# Altium PCB POWER-BOARD.PcbDoc
Units mil, origin at the board's own origin, x right, y up, seen from the top; angles counter-clockwise.
Board outline 475.03 x 1333.03 mil, 2 copper layers (Top Layer, Bottom Layer); 14 components, 9 nets, 52 pads, 14 vias.
Unrouted connection lines stored in the file: 1.
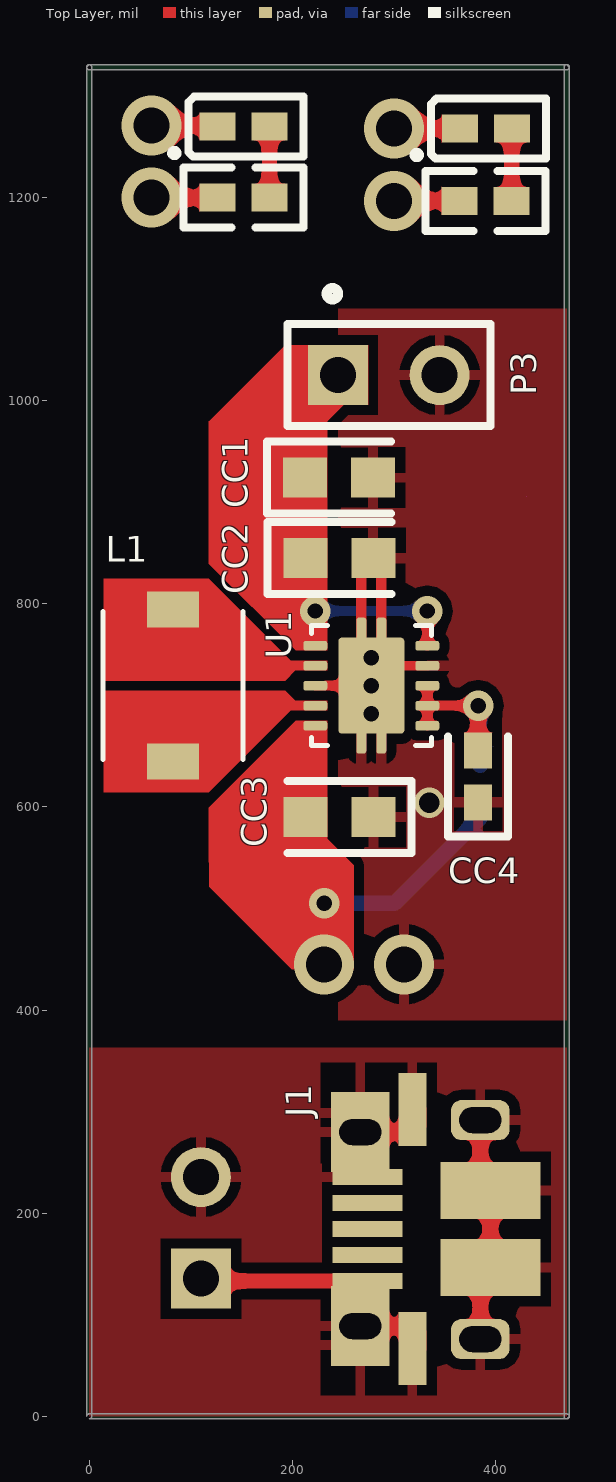
[diagram p0: Top Layer view]
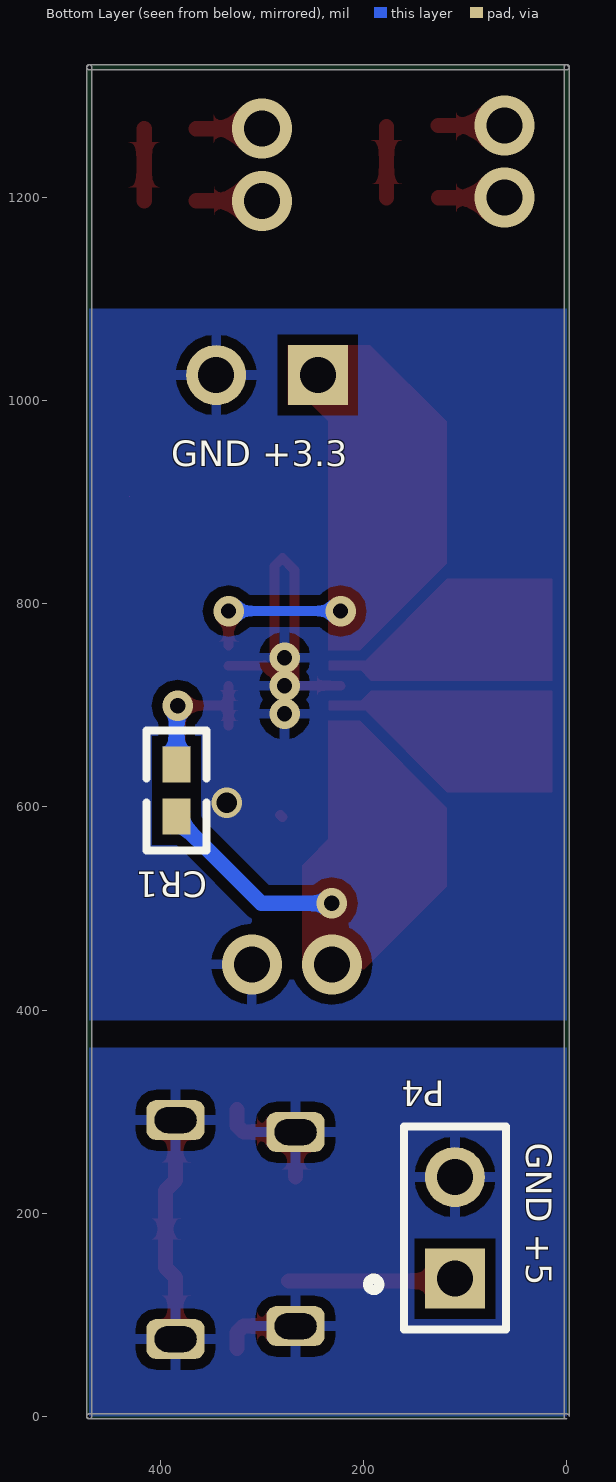
[diagram p1: Bottom Layer view, seen from below]

## Layer stack, top to bottom
Top Solder: solder mask 0.4, Solder Resist, Dk 3.5
Top Layer: signal copper 1.4
Dielectric 1: dielectric 12.6, FR-4, Dk 4.8
Bottom Layer: signal copper 1.4
Bottom Solder: solder mask 0.4, Solder Resist, Dk 3.5

## Board outline
-2.52,0 cw(c0,0) 0,2.51 470,2.51 cw(c470,0) 472.51,0 472.51,1328 cw(c470,1328) 470,1325.48 0,1325.48 cw(c0,1328) -2.52,1328 cw(c0,1328) 0,1330.52 cw(c0,1328) 2.51,1328 2.51,0 cw(c0,0) 0,-2.51 470,-2.51 ccw(c470,0) 472.51,0 470,-2.51 cw(c470,0) 467.48,0 467.48,1328 cw(c470,1328) 470,1330.52 cw(c470,1328) 472.51,1328 470,1330.52 0,1330.52 -2.52,1328

## Design rules (kind name [scope] priority, off if disabled: settings)
Clearance [All] p1: gap=10 ignorepadtopadclearanceinfootprint=FALSE except(5: SMDPad-SMDPad)
PlaneConnect [All] p1: planeconnectstyle=Relief reliefexpansion=20 reliefentries=4 reliefconductorwidth=10 reliefairgap=5
PolygonConnect [All] p1: connectstyle=Relief reliefconductorwidth=10 reliefentries=4 polygonreliefangle="90 Angle" airgapwidth=10
RoutingVias [All] p1: holewidth=28 width=40 viastyle="Through Hole" minholewidth=15 minwidth=30 maxholewidth=40 maxwidth=60
SolderMaskExpansion [All] p1: expansion=4
Width [All] p1: maxlimit=30 minlimit=5 preferedwidth=15
29 further rules are at their usual default settings.

## Classes and differential pairs
component class POWER-BOARD: CC1 CC2 CC3 CC4 CR1 CR2 J1 L1 LED1 P3 P4 U1

## Components (designator, comment, footprint, x,y, rotation, side; value= is the part's Value field where it differs from the comment)
CC1 "Cap Chip 0603" CC1608-0603 246.07,924.03 r0 top value=10uF
CC2 "Cap Chip 0603" CC1608-0603 246.26,844.89 r0 top value=10uF
CC3 "Cap Chip 0603" CC1608-0603 246.53,590 r180 top value=10uF
CC4 "Cap Chip 0402" CC1005-0402 382.85,629.92 r90 top value=0.1uF
CR1 "Resistor Chip 0402" CR1005-0402 383.92,616.07 r90 bottom value=100
CR2 "Resistor Chip 0402" CR1005-0402 390.19,1196.53 r0 top value=1K
CR3 "Resistor Chip 0402" CR1005-0402 151.78,1199.53 r0 top value=1K
J1 "MICRO-USB" MICRO-USB 385,184.41 r90 top
L1 "VLF4012-2R2" VLF4012-2R2-INDUCTOR 82.45,719.28 r90 top
LED1 "LED Chip" CLED1005-0402 390.37,1267.53 r180 top
LED2 "LED Chip" CLED1005-0402 151.78,1269.53 r180 top
P3 "Header 2" HDR1X2 245,1025 r0 top
P4 "Header 2" HDR1X2 110,135.59 r90 bottom
U1 "TPS63001" TPS63001 277.69,719.28 r0 top

## Footprints (in the part's own frame and the unit in brackets; to place one, negate y for a bottom-side part, rotate by r counter-clockwise, add the part's x,y. Pads: shape width x height; smd on the part's side, far side on the other; paste and mask are expansions set on the pad)
CC1005-0402 [mm]
  rect 0.9x0.7 smd: 1(-0.65,0) 2(0.65,0)
  silkscreen extent -1.5,-0.75 1,0.75, body extent -0.5,-0.25 0.5,0.25, height 0.3
CC1608-0603 [mm]
  rect 1.1x1 smd: 1(-0.85,0) 2(0.85,0)
  silkscreen extent -1.8,-0.9 1.3,0.9, body extent -0.8,-0.4 0.8,0.4, height 0.3
CLED1005-0402 [mm]
  rect 0.9x0.7 smd: 1(-0.65,0) 2(0.65,0)
  silkscreen extent -1.5,-0.75 1.78,0.75, body extent -0.5,-0.25 0.5,0.25, height 0.4
CR1005-0402 [mm]
  rect 0.9x0.7 smd: 1(-0.65,0) 2(0.65,0)
  silkscreen extent -1.5,-0.75 1.5,0.75, body extent -0.5,-0.25 0.5,0.25, height 0.35
HDR1X2 [mm] "Connector; Header; 2 Position"
  rect 1.5x1.5 hole 0.9: 1(0,0)
  round 1.5 hole 0.9: 2(2.54,0)
  silkscreen extent -1.27,-1.27 3.81,2.17, body extent -1.27,-1.27 3.81,1.27, height 8.54
MICRO-USB [mm]
  rect 0.4x1.75 smd: 1(-1.3,2.825) 2(-0.65,2.825) 3(0,2.825) 4(0.65,2.825) 5(1.3,2.825)
  rect 1.825x0.7 smd: 6(-2.987,1.7) 6(2.987,1.7)
  rrect50% 1x1.46 hole 1.05 slot 0.65 at 0 deg: 6(-2.75,0) 6(-2.425,3) 6(2.425,3) 6(2.725,0)
  rect 2x1.46 smd: 6(-2.425,3) 6(2.425,3)
  rect 1.425x2.5 smd: 6(-0.962,-0.25) 6(0.962,-0.25)
TPS63001 [mm]
  rrect50% 0.6x0.24 smd: 1(-1.4,1) 2(-1.4,0.5) 3(-1.4,0) 4(-1.4,-0.5) 5(-1.4,-1) 6(1.4,-1) 7(1.4,-0.5) 8(1.4,0) 9(1.4,0.5) 10(1.4,1)
  rrect50% 0.25x3.4 smd: 11(-0.25,0) 11(0.25,0)
  rrect10% 1.65x2.4 smd: 11(0,0)
  silkscreen extent -1.5,-1.5 1.5,1.5
VLF4012-2R2-INDUCTOR [mm]
  rect 0.9x1.3 smd: 1(-1.9,0) 2(1.9,0)
  silkscreen extent -1.85,-1.75 1.85,1.75

## Part data
CC1 CC2 CC3 CC4: "Polarized Capacitor (Radial)", Published=8-Jun-2000, Publisher="Altium Limited", Revision="July-2002: Re-released for DXP Platform."
CR1 CR2 CR3: "Resistor", Published=8-Jun-2000, Publisher="Altium Limited", Revision="July-2002: Re-released for DXP Platform."
LED1 LED2: "Typical Chip LED", Published=8-Jun-2000, Publisher="Altium Limited", Revision="July-2002: Re-released for DXP Platform."
P3 P4: "Header, 2-Pin", LatestRevisionDate=17-Jul-2002, LatestRevisionNote="Re-released for DXP Platform.", Publisher="Altium Limited"
L1: L=2.2uH

## Via types
v1: diameter 30, hole 15, Top Layer to Bottom Layer, 7 vias
v2: diameter 59.05, hole 35.43, Top Layer to Bottom Layer, 6 vias
v3: diameter 30, hole 20, Top Layer to Bottom Layer, 1 vias

## Nets (pads, with @x,y where several pads share a name; then routed paths per layer and width w, separated by ;. In a path a pad name is that pad's centre, name@x,y a point inside that pad or via, vN(x,y) a via of type N, cw(c..) or ccw(c..) an arc to the next point about the centre after c; other vN are vias at no path point)
+3.3: CC1.1 CC2.1 P3.1 U1.1 U1.10 | length 148.1
  Top Layer w10: U1.10@332.81,758.97 v1(332.81,792.74)
  Top Layer w15: v1@328.75,792.74 v1(332.81,792.74)
  Bottom Layer w10: v1(222.57,792.74) v1(332.81,792.74)
+3.7: CC3.2 CR1.1 U1.5 | length 188.7
  Bottom Layer w15: v1(231.26,505) 300.59,505 CR1.1@385,589.41
  other v2: 231.26,445
+5: J1.1 P4.1 | length 164.8
  Top Layer w15: P4.1 112.36,133.23 J1.1
GND: CC1.2 CC2.2 CC3.1 CC4.1 J1.5 J1.6 P3.2 P4.2 U1.3 U1.9 U1.11 | length 758.1
  Top Layer w9.5: U1.3 U1.11@267.85,719.28 ; U1.11@297.37,738.97 U1.9
  Top Layer w10: v1(277.69,719.28) 267.85,719.28 267.85,833.01 CC2.2 287.53,837.08 U1.11@287.53,729.13 ; CC3.1 CC3.1@281.97,591.97 ; U1.11@291.47,733.06 U1.11@297.37,738.97
  Top Layer w15: J1.5@266.89,235.96 J1.6@266.89,279.88 ; J1.6@273.32,88.94 318.22,88.94 324.5,82.66 J1.6@324.5,66.79 ; J1.6@273.32,279.88 318.22,279.88 324.5,286.16 J1.6@324.5,302.03 ; J1.6@385,76.14 385,136.67 394.84,146.52 394.84,222.3 385,232.15 J1.6@385,291.69
  other v1: 277.69,691.73 277.69,746.84
  other v2: 310,445
  other v3: 334.68,604
NetCC4_2: CC4.2 CR1.2 U1.6 U1.7 U1.8 | length 193.4
  Top Layer w9.5: U1.6 U1.7 U1.8
  Top Layer w10: U1.7 v1(382.85,699.6)
  Top Layer w15: CC4.2 v1(382.85,699.6)
  Bottom Layer w15: v1(382.85,699.6) 383.92,698.53 CR1.2 CR1.2@385,640.59
NetCR2_2: CR2.2 LED1.1 | length 71.1
  Top Layer w15: CR2.2 415.87,1196.62 415.87,1267.44 LED1.1
NetCR3_2: CR3.2 LED2.1 | length 70
  Top Layer w15: CR3.2 LED2.1
NetL1_1: L1.1 U1.4
NetL1_2: L1.2 U1.2
pads on no net: CR2.1 CR3.1 J1.2 J1.3 J1.4 LED1.2 LED2.2
copper on no net: | length 259.6
  Top Layer w15: v2(61.37,1199.53) 126.19,1199.53 ; v2(61.37,1270.53) 126.37,1270.53 ; v2(299.78,1196.53) 364.6,1196.53 ; v2(299.78,1267.53) 364.78,1267.53

## Polygon pours and split planes (outlines as drawn)
GND on Top Layer "Top Layer-GND" (solid, remove dead copper, pour order 44): 0,362.99 470,362.99 470,0 0,0
GND on Top Layer "Top Layer-GND 1" (solid, remove dead copper, pour order 32): 470,1090 470,390 245,390 245,1090
no net on Top Layer "Top Layer-No Net" (solid, pour order 26): 590,5
no net on Top Layer "Top Layer-No Net 1" (solid, pour order 10): 1115,1080.59
no net on Top Layer "Top Layer-No Net 2" (solid, pour order 8): 1115,1080.59
GND on Bottom Layer "Bottom Layer-GND" (solid, remove dead copper, pour order 42): 0,362.99 470,362.99 470,0 0,0
GND on Bottom Layer "Bottom Layer-GND 1" (solid, remove dead copper, pour order 30): 470,1090 470,390 0,390 0,1090

## Keep-outs
Keep-Out Layer:
  region: 430,905

## Other copper
Top Layer:
  region: 345,440
  region net +3.7: 117.85,568.53 117.99,521.31 199.3,440 260.39,440 260.39,542.64 254.57,548.46 234.5,568.53
  region: 261.99,528.88
  region net +3.3: 117.97,979.28 193.14,1054.46 274.47,1054.46 274.47,995.52 250.73,995.52 234.5,979.28
  region net +3.7: 200.27,343.59
  region net +3.3: 203.13,754.01 117.85,839.28 117.85,979.28 234.5,979.28 234.5,754.01
  region net NetL1_2: 198.39,743.74 117.85,824.29 14.1,824.29 14.1,724.29 192.85,724.29 202.85,734.29 234.35,734.29 234.35,743.74
  region: 175.35,729.28
  region net NetL1_1: 198.39,694.83 117.85,614.28 14.1,614.28 14.1,714.29 192.85,714.28 202.85,704.28 234.35,704.28 234.35,694.83
  region net +3.7: 203.13,684.57 117.85,599.28 117.85,568.53 234.5,568.53 234.5,684.57

## Silkscreen, mask and mechanical layers (free items; w line width, h text height)
Bottom Overlay:
  text "GND +3.3" at 389.41,935 h25
  text "GND +5" at 40,269.23 h25 r90
Mechanical 1:
  lines w5: 0,0 0,1328 470,1328 470,0 0,0